# EAGLE board Steckkarte (EAGLE 9.3.1)
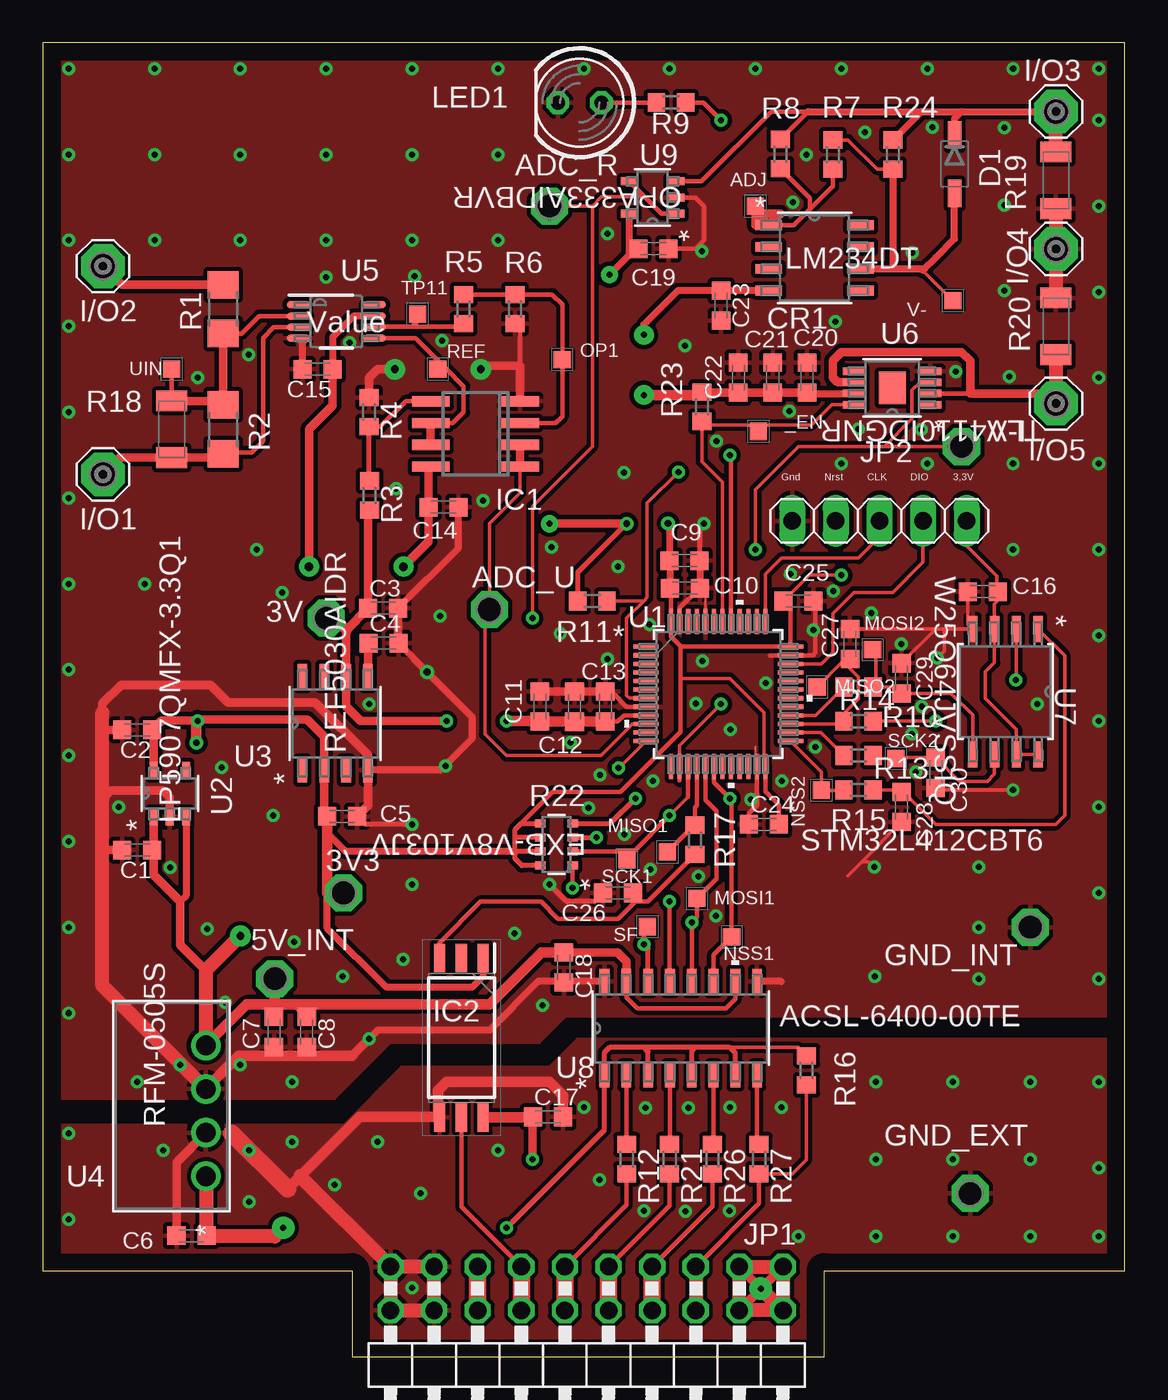
[diagram p0: board, top side]
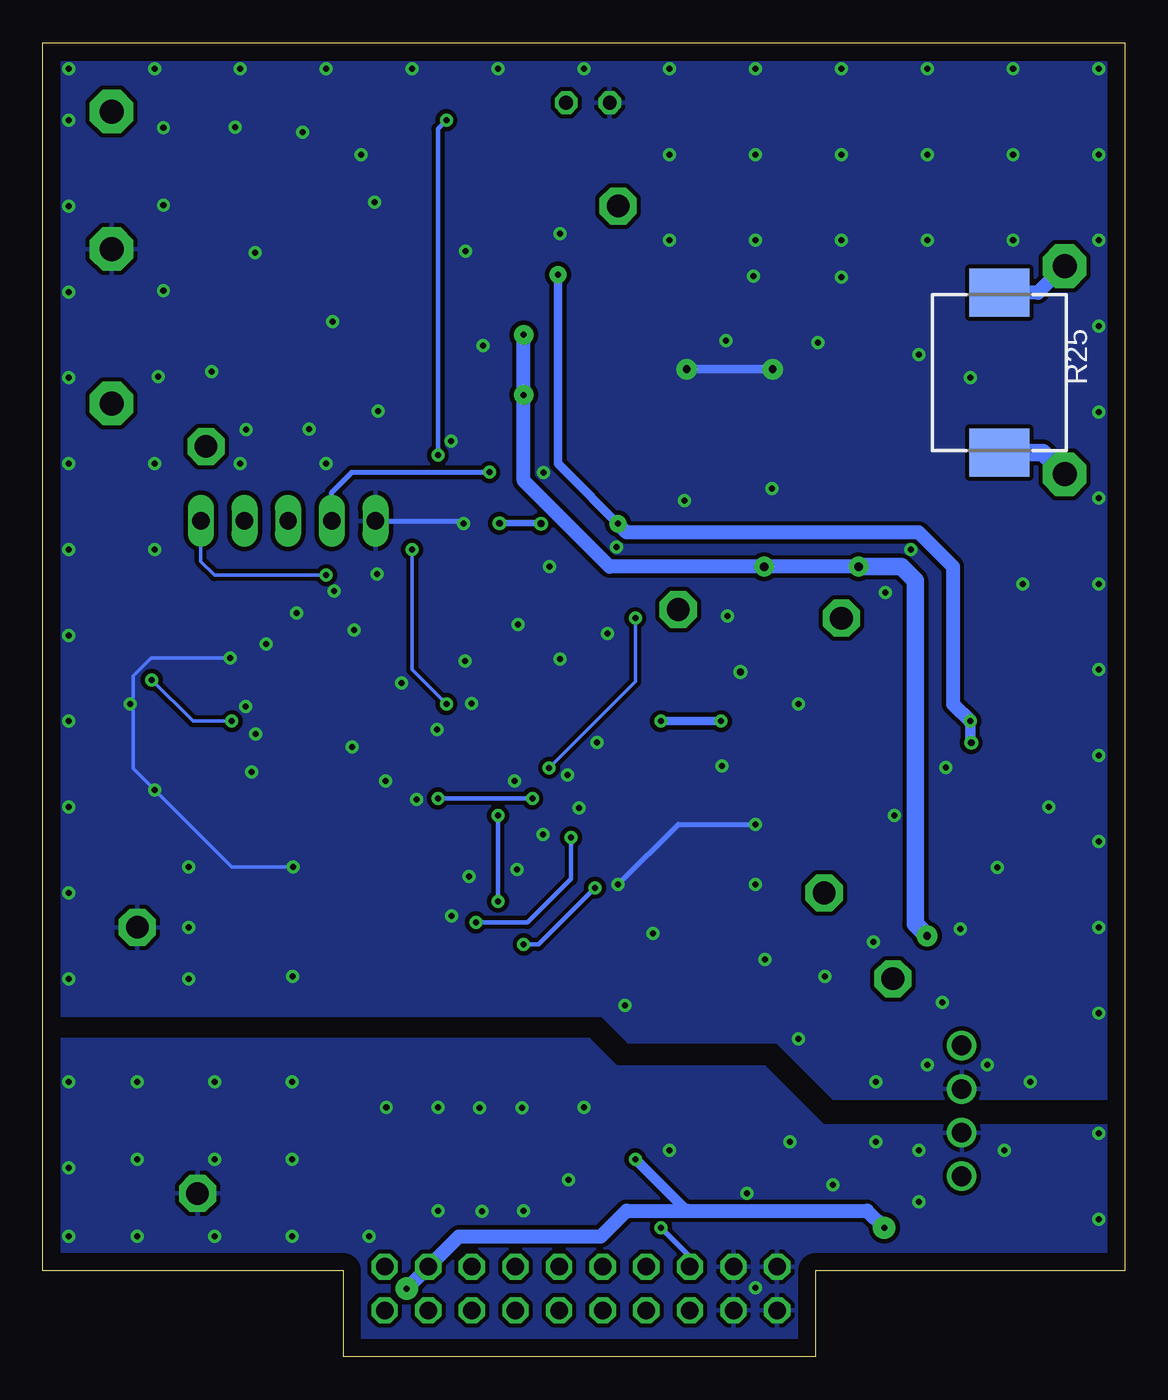
[diagram p1: board, bottom side, seen from below]

Size 63 x 76.5 mm. Coordinates in mm from the lower left corner, seen from the top.
Outline: 0,76.5 0,5 18,5 18,0 45.5,0 45.5,5 63,5 63,76.5 0,76.5
Copper layers (1*16): Top 0.035mm / dielectric 1.5mm / Bottom 0.035mm
Design rules "default": minimum track width 6mil, minimum drill 0.35mm, track to track 6mil, track to pad 6mil, pad to pad 6mil, via to via 6mil, smd to smd 6mil, copper to edge 40mil, drill to drill 6mil, minimum pad ring 10mil, minimum via ring 8mil, stop-mask expansion 4mil, vias tented up to drill 0mil, thermal gap 10mil

## Footprints (pad centres in the part's own frame; a part is rotated, then mirrored left to right if it is on the bottom)
P1-13 = drill 1.321 pad 2.159 octagon: TP 0,0
TESTPOINT_SMD-10SN = smd 1 x 1: TP 0,0
C0603K = smd 1.05 x 1.08: 1 -0.875,0; 2 0.875,0
SO-8 = smd 1.538 x 0.568: 1 -2.68,1.905; 2 -2.68,0.635; 3 -2.68,-0.635; 4 -2.68,-1.905; 5 2.68,-1.905; 6 2.68,-0.635; 7 2.68,0.635; 8 2.68,1.905
SOD123 = smd 1.6 x 0.8: 1 -1.7,0; 2 1.7,0
SE14 = drill 1.397 pad 2.54 octagon: MP 0,0
SO08 = smd 0.6 x 2.2: 1 -1.905,-2.6; 2 -0.635,-2.6; 3 0.635,-2.6; 4 1.905,-2.6; 5 1.905,2.6; 6 0.635,2.6; 7 -0.635,2.6; 8 -1.905,2.6
SOIC127P1000X220-6N = smd 1.65 x 0.65: 1 -4.65,1.27; 2 -4.65,0; 3 -4.65,-1.27; 4 4.65,-1.27; 5 4.65,0; 6 4.65,1.27
2X10/90 = drill 1.016 octagon: 1 -11.43,-6.35; 2 -11.43,-3.81; 3 -8.89,-6.35; 4 -8.89,-3.81; 5 -6.35,-6.35; 6 -6.35,-3.81; 7 -3.81,-6.35; 8 -3.81,-3.81; 9 -1.27,-6.35; 10 -1.27,-3.81; 11 1.27,-6.35; 12 1.27,-3.81; 13 3.81,-6.35; 14 3.81,-3.81; 15 6.35,-6.35; 16 6.35,-3.81; 17 8.89,-6.35; 18 8.89,-3.81; 19 11.43,-6.35; 20 11.43,-3.81
1X05 = drill 1.016 long: 1 -5.08,0; 2 -2.54,0; 3 0,0; 4 2.54,0; 5 5.08,0
LED5MM = drill 0.813 octagon: A -1.27,0; K 1.27,0
R1206 = smd 1.6 x 1.803: 1 -1.422,0; 2 1.422,0
R0603 = smd 1 x 1.1: 1 -0.85,0; 2 0.85,0
CT/CN1206 = smd 1.2 x 1.8: 1 -1.65,0; 2 1.65,0
EXBV8V = smd 0.609 x 0.47: 1 -0.946,1.219; 2 -0.946,0.406; 3 -0.946,-0.406; 4 -0.946,-1.219; 5 0.946,-1.219; 6 0.946,-0.406; 7 0.946,0.406; 8 0.946,1.219
CU4032K = smd 2.8 x 3.5: 1 -4.65,0; 2 4.65,0
LQFP-48 = smd 1.462 x 0.239: 1 -4.216,2.75; 2 -4.216,2.25; 3 -4.216,1.75; 4 -4.216,1.25; 5 -4.216,0.75; 6 -4.216,0.25; 7 -4.216,-0.25; 8 -4.216,-0.75; 9 -4.216,-1.25; 10 -4.216,-1.75; 11 -4.216,-2.25; 12 -4.216,-2.75; 25 4.216,-2.75; 26 4.216,-2.25; 27 4.216,-1.75; 28 4.216,-1.25; 29 4.216,-0.75; 30 4.216,-0.25; 31 4.216,0.25; 32 4.216,0.75; 33 4.216,1.25; 34 4.216,1.75; 35 4.216,2.25; 36 4.216,2.75 | smd 0.239 x 1.462: 13 -2.75,-4.216; 14 -2.25,-4.216; 15 -1.75,-4.216; 16 -1.25,-4.216; 17 -0.75,-4.216; 18 -0.25,-4.216; 19 0.25,-4.216; 20 0.75,-4.216; 21 1.25,-4.216; 22 1.75,-4.216; 23 2.25,-4.216; 24 2.75,-4.216; 37 2.75,4.216; 38 2.25,4.216; 39 1.75,4.216; 40 1.25,4.216; 41 0.75,4.216; 42 0.25,4.216; 43 -0.25,4.216; 44 -0.75,4.216; 45 -1.25,4.216; 46 -1.75,4.216; 47 -2.25,4.216; 48 -2.75,4.216
DBV5 = smd 0.972 x 0.468: 1 -1.362,0.95; 2 -1.362,0; 3 -1.362,-0.95; 4 1.362,-0.95; 5 1.362,0.95
D8 = smd 1.455 x 0.568: 1 -2.721,1.905; 2 -2.721,0.635; 3 -2.721,-0.635; 4 -2.721,-1.905; 5 2.721,-1.905; 6 2.721,-0.635; 7 2.721,0.635; 8 2.721,1.905
RFM-0505S = drill 1.143 pad 1.651: 1 0,0; 2 2.54,0; 3 5.08,0; 4 7.62,0
DGK0008A_N = smd 1.35 x 0.45: 1 -2.225,0.975; 2 -2.225,0.325; 3 -2.225,-0.325; 4 -2.225,-0.975; 5 2.225,-0.975; 6 2.225,-0.325; 7 2.225,0.325; 8 2.225,0.975
DGN8_1P89X1P57 = smd 1.328 x 0.441: 1 -2.213,0.975; 2 -2.213,0.325; 3 -2.213,-0.325; 4 -2.213,-0.975; 5 2.213,-0.975; 6 2.213,-0.325; 7 2.213,0.325; 8 2.213,0.975 | smd 1.57 x 1.89: EPAD 0,0
SOIC-8_5P28X5P28 = smd 1.513 x 0.543: 1 -3.645,1.905; 2 -3.645,0.635; 3 -3.645,-0.635; 4 -3.645,-1.905; 5 3.645,-1.905; 6 3.645,-0.635; 7 3.645,0.635; 8 3.645,1.905
SOIC_6400-00TE = smd 1.455 x 0.568: 1 -2.721,4.445; 2 -2.721,3.175; 3 -2.721,1.905; 4 -2.721,0.635; 5 -2.721,-0.635; 6 -2.721,-1.905; 7 -2.721,-3.175; 8 -2.721,-4.445; 9 2.721,-4.445; 10 2.721,-3.175; 11 2.721,-1.905; 12 2.721,-0.635; 13 2.721,0.635; 14 2.721,1.905; 15 2.721,3.175; 16 2.721,4.445

## Placement (x,y rotation side)
3V  TPPAD1-13  [P1-13]  16.5,43 0 top
3V3  TPPAD1-13  [P1-13]  17.5,27 0 top
5V_INT  TPPAD1-13  [P1-13]  13.5,22 0 top
_EN  TESTPOINT_TPS-SMD-10SN  [TESTPOINT_SMD-10SN]  41.68,53.88 0 top
ADC_R  TPPAD1-13  [P1-13]  29.5,67 0 top
ADC_U  TPPAD1-13  [P1-13]  26,43.5 0 top
ADJ  TESTPOINT_TPS-SMD-10SN  [TESTPOINT_SMD-10SN]  41.5,67 0 top
C1  4,7µ  [C0603K]  5.5,29.5 180 top
C2  2.2µ  [C0603K]  5.5,36.5 180 top
C3  4.7µ  [C0603K]  19.82,43.58 0 top
C4  1µ  [C0603K]  19.83,41.54 0 top
C5  2.2µ  [C0603K]  17.43,31.46 0 top
C6  6,8µ  [C0603K]  8.65,7.04 180 top
C7  4.7µ  [C0603K]  13.46,18.91 270 top
C8  NC  [C0603K]  15.36,18.91 270 top
C9  4.7µ  [C0603K]  37.37,46.35 0 top
C10  100n  [C0603K]  37.38,44.75 0 top
C11  4.7µ  [C0603K]  28.94,37.85 270 top
C12  100n  [C0603K]  30.96,37.84 270 top
C13  10n  [C0603K]  32.75,37.85 270 top
C14  100n  [C0603K]  23.33,49.46 0 top
C15  100n  [C0603K]  16,57.5 180 top
C16  100n  [C0603K]  54.75,44.54 180 top
C17  100n  [C0603K]  29.41,13.96 0 top
C18  100n  [C0603K]  30.33,22.66 270 top
C19  100n  [C0603K]  35.56,64.51 180 top
C20  100n  [C0603K]  44.5,57 90 top
C21  1µ  [C0603K]  42.5,57 90 top
C22  4.7µ  [C0603K]  40.5,57 90 top
C23  100n  [C0603K]  39.49,61.21 270 top
C24  100n  [C0603K]  42,31 0 top
C25  100n  [C0603K]  44,44 0 top
C26  [C0603K]  33.5,27 180 top
C27  100n  [C0603K]  47,41.5 90 top
C28  100n  [C0603K]  50,32 90 top
C29  100n  [C0603K]  50,39.5 90 top
C30  100n  [C0603K]  52,34 90 top
CR1  LM234DT  [SO-8]  44.94,63.98 0 top
D1  [SOD123]  53.09,69.45 270 top
GND_EXT  TPPAD1-13  [P1-13]  54,9.5 0 top
GND_INT  TPPAD1-13  [P1-13]  57.5,25 0 top
I/O1  SE14  [SE14]  3.5,51.38 0 top
I/O2  SE14  [SE14]  3.5,63.5 0 top
I/O3  SE14  [SE14]  59,72.5 0 top
I/O4  SE14  [SE14]  59,64.5 0 top
I/O5  SE14  [SE14]  59,55.5 0 top
IC1  OPA2333D  [SO08]  25.19,53.73 90 top
IC2  TLP2768A_TP,E  [SOIC127P1000X220-6N]  24.37,18.57 270 top
JP1  [2X10/90]  31.67,-1.12 180 top
JP2  [1X05]  48.72,48.67 180 top
LED1  [LED5MM]  31.26,73.02 180 top
MISO1  TESTPOINT_TPS-SMD-10SN  [TESTPOINT_SMD-10SN]  36.37,29.38 0 top
MISO2  TESTPOINT_TPS-SMD-10SN  [TESTPOINT_SMD-10SN]  45.09,39 0 top
MOSI1  TESTPOINT_TPS-SMD-10SN  [TESTPOINT_SMD-10SN]  38.08,26.68 0 top
MOSI2  TESTPOINT_TPS-SMD-10SN  [TESTPOINT_SMD-10SN]  48.32,41.17 0 top
NSS1  TESTPOINT_TPS-SMD-10SN  [TESTPOINT_SMD-10SN]  40.11,24.44 0 top
NSS2  TESTPOINT_TPS-SMD-10SN  [TESTPOINT_SMD-10SN]  45.33,32.98 0 top
OP1  TESTPOINT_TPS-SMD-10SN  [TESTPOINT_SMD-10SN]  30.25,58.06 0 top
R1  5M  [R1206]  10.5,61 90 top
R2  100k  [R1206]  10.5,54 90 top
R3  10k  [R0603]  19.03,50.15 270 top
R4  20k  [R0603]  19,55 270 top
R5  40k  [R0603]  24.5,61 270 top
R6  120k  [R0603]  27.5,61 90 top
R7  536  [R0603]  46,70 270 top
R8  536  [R0603]  42.94,70.03 270 top
R9  1k  [R0603]  36.59,73.03 0 top
R10  22  [R0603]  47.5,37 180 top
R11  1k  [R0603]  32,44 180 top
R12  160  [R0603]  34,11.5 270 top
R13  22  [R0603]  47.5,35 0 top
R14  22  [R0603]  47.5,39 0 top
R15  22  [R0603]  47.5,33 180 top
R16  10k  [R0603]  44.47,16.67 90 top
R17  160  [R0603]  37.97,30.09 90 top
R18  VARISTORCN1206  [CT/CN1206]  7.5,54 270 top
R19  VARISTORCN1206  [CT/CN1206]  59,68.5 270 top
R20  VARISTORCN1206  [CT/CN1206]  59,60 90 top
R21  160  [R0603]  36.5,11.5 270 top
R22  EXB-V8V103JV  [EXBV8V]  29.91,29.82 180 top
R23  10k  [R0603]  38.38,55.31 90 top
R24  0  [R0603]  49.5,70 270 top
R25  VARISTORCU4032K  [CU4032K]  7.3,57.3 270 bottom
R26  160  [R0603]  39,11.5 270 top
R27  160  [R0603]  41.71,11.5 270 top
REF  TESTPOINT_TPS-SMD-10SN  [TESTPOINT_SMD-10SN]  23,57.5 0 top
SCK1  TESTPOINT_TPS-SMD-10SN  [TESTPOINT_SMD-10SN]  34.02,28.93 0 top
SCK2  TESTPOINT_TPS-SMD-10SN  [TESTPOINT_SMD-10SN]  49.67,34.83 0 top
SF  TESTPOINT_TPS-SMD-10SN  [TESTPOINT_SMD-10SN]  35.2,25.04 0 top
TP11  TESTPOINT_TPS-SMD-10SN  [TESTPOINT_SMD-10SN]  21.83,60.7 0 top
U1  STM32L412CBT6  [LQFP-48]  39.33,38.59 0 top
U2  LP5907QMFX-3.3Q1  [DBV5]  7.39,32.79 90 top
U3  REF5030AIDR  [D8]  17.02,36.87 90 top
U4  RFM-0505S  [RFM-0505S]  9.49,10.5 90 top
U5  Value  [DGK0008A_N]  17.09,60.27 0 top
U6  TLV4110IDGNR  [DGN8_1P89X1P57]  49.46,56.41 180 top
U7  W25Q64JVSSIQ  [SOIC-8_5P28X5P28]  56.05,38.72 270 top
U8  ACSL-6400-00TE  [SOIC_6400-00TE]  37.15,19.12 90 top
U9  OPA333AIDBVR  [DBV5]  35.5,67.5 180 top
UIN  TESTPOINT_TPS-SMD-10SN  [TESTPOINT_SMD-10SN]  7.5,57.5 0 top
V-  TESTPOINT_TPS-SMD-10SN  [TESTPOINT_SMD-10SN]  53,61.5 180 top
V-I  TPPAD1-13  [P1-13]  53.5,53 0 top

## Library data of the parts
3V 3V3 5V_INT ADC_R ADC_U GND_EXT GND_INT V-I = testpad
_EN ADJ MISO1 MISO2 MOSI1 MOSI2 NSS1 NSS2 OP1 REF SCK1 SCK2 SF TP11 UIN V- = 52101-101-REV-A; BOM: EXCLUDE
C1-C5 C9-C30 = rcl; SPICEPREFIX: C
C6-C8 = resistor
CR1 = LM234; BUILT_BY: EMA_UL_Team; MANUFACTURER_PART_NUMBER: LM234DT; VENDOR: STMicroelectronics
D1 = semicon-smd-ipc
I/O1-I/O5 = solpad
IC1 = linear
IC2 = SamacSys_Parts; DESCRIPTION: High Speed Optocouplers High-Speed (20 Mbps) IC Photocoupler; HEIGHT: 2.2mm; MANUFACTURER_NAME: Toshiba; MANUFACTURER_PART_NUMBER: TLP2768A(TP,E; MOUSER_PART_NUMBER: 757-TLP2768ATPE; MOUSER_PRICE-STOCK: https://www.mouser.com/Search/Refine.aspx?Keyword=757-TLP2768ATPE
JP1 JP2 = pinhead
LED1 = led
R1-R17 R21 R23 R24 R26 R27 = rcl; SPICEPREFIX: R
R18-R20 R25 = varistor
R22 = EXB-V8V103; BUILT_BY: EMA_UL_Team; MANUFACTURER_PART_NUMBER: EXB-V8V103JV; VENDOR: Panasonic
U1 = stm32l412CB6T; BUILT_BY: EMA_Jessica; COPYRIGHT: Copyright (C) 2018 Accelerated Designs. All rights reserved; MANUFACTURER_PART_NUMBER: STM32L412CBT6; VENDOR: STMicroelectronics
U2 = LP5907; BUILT_BY: EMA_UL_Team; MANUFACTURER_PART_NUMBER: LP5907QMFX-3.3Q1; VENDOR: Texas Instruments
U3 = REF5030; BUILT_BY: EMA_UL_Team; MANUFACTURER_PART_NUMBER: REF5030AIDR; VENDOR: Texas Instruments
U4 = RFM0505S; BUILT_BY: EMA_Cory; COPYRIGHT: Copyright (C) 2018 Accelerated Designs. All rights reserved; MANUFACTURER_PART_NUMBER: RFM-0505S; VENDOR: Recom Power
U5 = ina317; MANUFACTURER: Texas Instruments; PARTNUMBER: INA317IDGKR; REFDES: RefDes; TYPE: TYPE
U6 = TLV4110; DATASHEET_URL: http://www.ti.com/lit/gpn/TLV4110; DESCRIPTION: High Output Drive, Low Voltage, Single Operational Amplifier w/Shutdown; FAMILY_NAME: HIGH OUTPUT CURRENT; GENERIC_PART_NUMBER: TLV4110; INDUSTRY_STD_PKG_TYPE: MSOP-PowerPAD; MANUFACTURER: Texas Instruments; MANUFACTURER_PART_NUMBER: TLV4110IDGNR; PACKAGE_DESIGNATOR: DGN; PIN_COUNT: 8; VENDOR: Texas Instruments
U7 = W25Q64JVSSIQ; BUILT_BY: EMA_Anthony; COPYRIGHT: Copyright (C) 2018 Accelerated Designs. All rights reserved; MANUFACTURER_PART_NUMBER: W25Q64JVSSIQ; VENDOR: Winbond
U8 = ACSL-6400; BUILT_BY: EMA_Matt; COPYRIGHT: Copyright (C) 2018 Accelerated Designs. All rights reserved; MANUFACTURER_PART_NUMBER: ACSL-6400-00TE; VENDOR: Broadcom
U9 = OPA2333ADBV; DATASHEET_URL: http://www.ti.com/lit/gpn/OPA333; DESCRIPTION: 1.8V, 17µA, microPower, Precision, Zero Drift CMOS Op Amp; FAMILY_NAME: LOW OFFSET VOLTAGE; GENERIC_PART_NUMBER: OPA333; INDUSTRY_STD_PKG_TYPE: SOT-23; MANUFACTURER: Texas Instruments; MANUFACTURER_PART_NUMBER: OPA333AIDBVR; PACKAGE_DESIGNATOR: DBV; PIN_COUNT: 5; VENDOR: Texas Instruments

## Nets
3.3V_EXT: JP1.15 JP1.16 R16.2 U8.1 U8.3 U8.5 U8.7
5V_EXT: C6.1 C17.1 IC2.6 JP1.1 JP1.2 JP1.3 JP1.4 U4.1
+3V3: 3V3.TP C2.1 C5.1 C9.1 C10.1 C16.1 C19.2 C24.2 C25.1 IC2.1 JP2.1 R11.2 R22.5 R22.6 R22.7 R22.8 U1.24 U1.36 U1.48 U2.5 U3.2 U7.3 U7.7 U7.8 U9.5
+5V: 5V_INT.TP C1.1 C7.1 C8.1 C14.1 C15.1 C18.1 C20.1 C21.1 C22.1 C23.1 CR1.4 IC1.8 R23.2 U2.1 U2.3 U4.4 U5.7 U6.7 U8.10 U8.15
ADC1: ADC_U.TP IC1.1 IC1.2 U1.10
ADC2: ADC_R.TP U1.12 U9.1 U9.4
DAC1: U1.14 U6.3 V-I.TP
DAC1_EN: _EN.TP R23.1 U1.42 U6.8
GND: C6.2 C17.2 GND_EXT.TP IC2.4 JP1.17 JP1.18 JP1.19 JP1.20 U4.2
GND5: C1.2 C2.2 C3.2 C4.2 C5.2 C7.2 C8.2 C9.2 C10.2 C11.1 C12.1 C13.1 C14.2 C15.2 C16.2 C18.2 C19.1 C20.2 C21.2 C22.2 C23.2 C24.1 C25.2 C26.2 C27.2 C28.1 C29.2 C30.1 GND_INT.TP I/O4.MP IC1.4 JP2.5 LED1.K R4.1 R6.1 R19.2 R20.2 U1.8 U1.23 U1.35 U1.44 U1.47 U2.2 U3.4 U4.3 U5.4 U6.4 U7.4 U8.9 U8.16 U9.2
LED: R9.2 U1.41
LSP1: I/O2.MP R1.2 R25.1
LSP2: I/O1.MP R2.1 R18.2 R25.2 U5.3
LSP3: D1.1 I/O3.MP R8.1 R19.1 R24.1 U9.3
LSP5: I/O5.MP R20.1 U6.2 U6.6
MISO_EXT: IC2.5 JP1.13 JP1.14
MOSI_EXT: JP1.7 JP1.8 R26.2
N$1: LED1.A R9.1
N$2: R1.1 R2.2 R18.1 U5.2 UIN.TP
N$3: R10.1 U7.2
N$4: R5.2 TP11.TP U5.6
N$6: IC1.5 R3.1 R4.2
N$7: C4.1 U3.5
N$8: IC1.6 IC1.7 REF.TP U5.5
N$9: R27.1 U8.8
N$11: CR1.6 D1.2 R7.1 R24.2 V-.TP
N$12: ADJ.TP CR1.1 R7.2 R8.2
N$13: C30.2 R13.2 SCK2.TP U7.6
N$14: C29.1 MOSI2.TP R14.2 U7.5
N$15: C28.2 R15.1 U7.1
N$16: R26.1 U8.6
N$17: R21.1 U8.4
N$18: R12.1 U8.2
N$19: C26.1 IC2.3 R17.1
OP1: IC1.3 OP1.TP R5.1 R6.2
RST: JP2.4 R11.1 U1.7
SCLK_EXT: JP1.9 JP1.10 R21.2
SF_EXT: JP1.11 JP1.12 R12.2
SF_INT: R22.1 SF.TP U8.14
SPI1_MISO: MISO1.TP R17.2 U1.16
SPI1_MOSI: MOSI1.TP R22.3 U1.17 U8.12
SPI1_NSS: NSS1.TP R22.4 U1.18 U8.11
SPI1_SCK: R22.2 SCK1.TP U1.15 U8.13
SPI2_MISO: C27.1 MISO2.TP R10.2 U1.27
SPI2_MOSI: R14.1 U1.28
SPI2_NSS: NSS2.TP R15.2 U1.25
SPI2_SCK: R13.1 U1.26
SS_EXT: JP1.5 JP1.6 R16.1 R27.2
SWCLK: JP2.3 U1.37
SWDIO: JP2.2 U1.34
V+: 3V.TP C3.1 C11.2 C12.2 C13.2 R3.2 U1.9 U3.6
VBAT: U1.1

## Tracks (layer width: path | path; a pad name or v marks a point on that pad's centre or on a via)
3.3V_EXT  (via drill 0.35)
  Top 0.152: R16.2 44.31,17.68
  Top 0.203: R16.2 43.99,18 40,18
  Top 0.305: v27,7.5 32.7,13.21 U8.1 32.68,16.42 32.68,17.68 33,18 35,18 | 38,18 40,18 40.33,17.68 U8.7 | 38,18 35,18 | U8.3 35.24,17.75 35,18 | U8.5 37.78,17.79 38,18
  Top 1.016: JP1.16 JP1.15
  Bottom 0.305: JP1.15 25.32,5.82 v27,7.5
5V_EXT  (via drill 0.35, 0.35 pad 1.3)
  Top 0.508: v28.5,11.5 28.5,13.99 C17.1 | JP1.3 41.83,3.96 | JP1.1 41.83,3.96 | JP1.4 41.83,3.96
  Top 0.61: C17.1 28.42,13.92 IC2.6
  Top 0.813: 9.5,7.01 9.5,7 13.5,7 v14,7.5 | 9.5,7.01 C6.1 | JP1.2 JP1.4 JP1.3 JP1.1 JP1.2 | U4.1 9.5,7.01 | JP1.2 43.1,2.9 | JP1.2 41.83,3.96 v41.81,3.96
  Bottom 0.61: v28.5,11.5 25.5,8.5
  Bottom 0.813: v41.81,3.96 38.77,7 30.5,7 29,8.5 25.5,8.5 15,8.5 v14,7.5
+3V3  (via drill 0.35, 0.35 pad 1, 0.4 pad 0.8)
  Top 0.203: U7.8 U7.7 56.69,36.52 54.89,38.32 54.89,39.89 55.41,40.41 U7.3 55.41,43.83 55.54,43.96 55.54,44.46 | 55.54,44.46 C16.1 | JP2.1 53.8,47.2 55.54,45.46 55.54,44.46 | C25.1 44.62,45.5 v46.5,45.5 | 37.13,39.5 40,39.5 42,37.5 42,35 42.08,34.92 U1.24
  Top 0.254: C10.1 36.58,44.75 U1.48 36.58,41.93 37.17,41.34 | 27.8,30.99 29.69,32.88 33.63,32.88 37.13,36.38 37.13,39.5 37.13,41.34 37.17,41.34 | C25.1 43.55,43.58 U1.36 37.17,41.34 | U1.24 42.08,32.92 42.75,32.25 42.88,32.12 C24.2
  Top 0.305: R22.8 27.9,28.6 27.5,29 27.5,29.46 | 27.5,29.46 27.5,30.23 | 27.5,30.23 27.5,30.69 27.8,30.99 27.85,31.04 R22.5 | R22.6 27.5,30.23 | 27.5,30.23 | R22.7 27.55,29.41 27.5,29.46 | 31,44.15 R11.2 31.15,45.68 33.99,48.51
  Top 0.406: C10.1 36.51,46.34 C9.1 36.49,48.44 v36.41,48.52 | 27.55,29.41 17.64,29.41 16.55,30.5 | IC2.1 25.64,22.14 25,21.5 20,21.5 16.55,24.95 16.55,27 | U9.5 34.14,64.5 | 34.14,64.5 34.14,64.14 v33,63 | C19.2 34.15,64.51 34.14,64.5
  Top 0.508: C5.1 16.38,31.63 U3.2 16.38,36.12 15.39,37.11 9,37.11 | 8.94,37.04 6.92,37.04 C2.1 6.44,36.44 U2.5 | v29.5,48.5 29.51,48.51 33.99,48.51
  Top 0.61: C5.1 16.55,30.5 16.55,27 3V3.TP | v8.94,35.75 8.94,37.04 9,37.11 | 33.99,48.51 v34,48.5
  Bottom 0.203: v46.5,45.5 53,45.5 53.8,46.3 JP2.1
  Bottom 0.406: v34,48.5 v36.41,48.52
  Bottom 0.508: 29,48 33,52 v33,63
  Bottom 0.61: v8.94,35.75 9,35.81 v9,37
  Bottom 0.813: v9,37 10,38 10,46 12,48 29,48 v29.5,48.5
+5V  (via drill 0.35 pad 1.15, 0.45 pad 1.2, 0.5 pad 1.15)
  Top 0.203: 38.41,56.12 R23.2
  Top 0.254: 34,20.93 34.64,20.29 39.79,20.29 40.33,20.82 U8.10
  Top 0.305: 34,21.82 34,20.93
  Top 0.406: C7.1 13.5,19.82 13.5,20.5 14.65,20.5 C8.1 15.36,20.36 15.5,20.5 | U2.3 8.34,26.84 8,26.5 | 30.29,23.5 C18.1 | U8.15 34,21.82 | CR1.4 39.5,62.08 C23.1 36.99,62.09 35,60.09 v35,59.5 | U5.7 18.09,60.59 16.88,59.38 C15.1 | C20.1 44.54,56.09 U6.7
  Top 0.508: IC1.8 22.45,51.69 C14.1 22.45,47.45 v21,46 | U2.1 6.44,29.57 | 6.44,29.57 6.44,28.06 8,26.5 8,23.98 9.49,22.49 | C18.1 33.46,23.54 33.98,23.02 U8.15 | C1.1 6.44,29.57 | v15.5,46 15.5,54 16.88,55.38 C15.1 16.64,57.27 | C20.1 C21.1 C22.1 38.41,56.12 | 39.08,62.08 39.5,62.08
  Top 0.61: U4.4 11.87,20.5 13.5,20.5 | 13.5,20.5 15.5,20.5 26.01,20.5 29.05,23.54 30.25,23.54 30.29,23.5 | 5V_INT.TP 13.5,20.5 | R23.2 38.22,56 v35,56
  Top 0.813: v11.5,24.5 9.49,22.49 U4.4
  Bottom 0.813: v15.5,46 v21,46 30,46 35,51 v35,56 v35,59.5
  Bottom 1.016: v11.5,24.5 12.2,25.2 12.2,45.2 13,46 v15.5,46
ADC1
  Top 0.203: IC1.1 27.79,50.29 26,48.5 ADC_U.TP | 26.5,43.5 25.75,42.75 25.75,36.25 27,35 32.5,35 34.34,36.84 U1.10
  Top 0.254: ADC_U.TP 26.5,43.5
  Top 0.508: IC1.1 IC1.2
ADC2  (via drill 0.35, 0.35 pad 0.55)
  Top 0.203: U1.12 33.56,34.29 | v28.5,43 28.5,49.5 32,53 32,67 | 35.04,67.54 32.54,67.54 32,67 | ADC_R.TP 32,67
  Top 0.254: 33.56,34.29 v33.51,34.29 | U9.4 35.04,67.54 36.04,66.55 U9.1
  Bottom 0.203: v28.5,43 28.5,39.3 v33.51,34.29
DAC1  (via drill 0.35)
  Top 0.203: U1.14 37.08,35.58 v39.5,38 | v41.5,47 41.5,50.5 44,53 49,53 | 49,53 50.62,54.62 50.62,56.27 51.07,56.73 U6.3 | V-I.TP 49,53
  Top 0.254: 37.08,33.54 U1.14
  Bottom 0.203: v39.5,38 41.5,40 v41.5,47
DAC1_EN
  Top 0.203: U6.8 45.94,55.44 44.75,54.25 41.74,54.25 41.68,54.19 _EN.TP | 41.5,54.23 41.68,54.23 _EN.TP | 41.5,54.23 38.61,54.23 R23.1 38.38,52.12 39.58,50.92 U1.42 | _EN.TP 41.5,54.06 41.5,54.23
GND  (via drill 0.35 pad 0.2)
  Top 0.508: C6.2 7.78,11.32 U4.2
  Top 0.61: 14.24,9.76 14.99,10.51 18.43,13.96 23.06,13.96 | 23.06,13.96 IC2.4 | 23.06,13.96 23,14.02 23,15.5 23.5,16 29.5,16 30.28,15.22 C17.2
  Top 0.813: JP1.19 JP1.17 JP1.18 JP1.20 JP1.19 | JP1.19 20.24,5.26 14.99,10.51
  Top 1.016: 11,13 14.24,9.76
  other vias: 17,10 12,9 1.5,13 1.5,8 31.5,14.5 57.5,7 53,7 57.5,11.5 57.5,16 61.5,16 53,11.5 61.5,7 40,14.5 48.5,7 22,9.5 14.5,12.5 48.5,11.5 48.5,16 19.5,12.5 21.5,4 53,16 32.4,10.3 44,7 26.5,12 35.08,14.49 37.58,14.49 43,14.5 35,8.5 37.43,8.47 39.99,8.49 61.5,11 7,12 12,12
  pour Top (isolate 0.24): 62.5,18.5 31.1,18.5 29.48,16.87 20.87,16.87 17.5,13.5 0.5,13.5 0.5,5.19 18.5,5.19 18.5,0.5 45,0.5 45,5.5 62.5,5.5
  pour Bottom (isolate 0.254): 0.5,5.21 18.5,5.2 18.5,0.5 45,0.5 45,5.5 62.5,5.5 62.5,18.5 31.17,18.5 29.57,16.89 20.94,16.89 17.51,13.46 0.49,13.46
GND5  (via drill 0.35, 0.35 pad 0.2, 0.35 pad 0.6, 0.4 pad 0.8, 0.45 pad 1.2)
  Top 0.152: C10.2 38.58,44.42 U1.44 | U1.23 41.5,34.45 41.5,35.5
  Top 0.203: 52.5,42.37 U7.4 53.88,42.63 C16.2 | 52.5,42.37 51.99,42.37 | 51.99,42.37 C29.2 | C27.2 51.98,42.38 51.99,42.37 | C30.1 52.12,33 v56.5,33 | 46.88,28 47.69,28.81 | 47.69,28.81 C28.1 | 47.69,28.81 48.11,28.81 v48.42,28.5 | 52.5,42.37 52.5,41.1 v52.08,40.69
  Top 0.254: 42.88,21.97 43,21.84 | 42.35,40.84 U1.35 44.84,40.84 45,41 45,43.88 C25.2 | U1.8 34,37.84 33.12,38.72 C13.1 32.78,38.72 | R6.1 27.79,59.86 27.79,57.72 | U1.23 41.58,32.08 41.12,31.62 C24.1 | C19.1 38.01,64.51 38.5,65 38.5,67 38,67.5 U9.2 | U1.47 37.08,43.58 C10.2
  Top 0.305: C26.2 32.12,26.5 30.5,26.5 v29.5,27.5 | v21.5,31 18.77,31 C5.2 | v38.5,48.5 38.24,48.24 C9.2
  Top 0.406: U8.16 30.39,21.84 28.84,21.84 26,19 19.5,19 v19,18.5 | C8.2 15.5,17.9 15.5,17.5 14,17.5 C7.2 | C3.2 24.2,47.09 C14.2 | 43,21.84 U8.9 | C4.2 v22.37,39.87 25,37.24 25,36 23.15,34.15 U3.4 | C9.2 38.26,46.34 C10.2 | C15.2 15.12,59.03 U5.4
  Top 0.508: C13.1 C12.1 C11.1 | IC1.4 27.79,57.72 25.72,57.72 v25.5,57.5 | U2.2 7.39,32.56 6.99,32.96 3.96,32.96 3.46,32.46 | C4.2 20.69,41.55 C3.2 | C5.2 18.93,32.08 U3.4 18.93,35.03 15.86,38.1 10.78,38.1 9.76,39.12 4.56,39.12 3.46,38.02 3.46,37.5 3.46,36.82 | 18,17.5 v19,18.5 | R4.1 19,57 19.5,57.5 v20.5,57.5 | C1.2 3.46,29.5 | C2.2 3.46,36.5
  Top 0.61: 30.39,21.84 C18.2 | 18,17.5 15.5,17.5 11.41,17.5 U4.3 | C16.2 53.84,44.5
  Top 0.813: R19.2 I/O4.MP R20.2 | U4.3 3.46,21.61 3.46,29.5 3.46,32.46 3.46,36.5 3.46,37.5
  Bottom 0.203: v48.42,28.5 52,28.5 v56.5,33 57.75,34.25 57.75,39.63 56.69,40.69 v52.08,40.69
  Bottom 0.305: v29.5,27.5 26,31 v21.5,31 | v38.5,48.5 38.67,48.67 JP2.5
  Bottom 0.508: v20.5,57.5 v25.5,57.5
  other vias: 21.5,27.5 54.5,25 54.5,28.5 45,35.5 54.5,22 61.5,22 61.5,27 61.5,32 61.5,37 61.5,42 61.5,47 61.5,52 61.5,57 61.5,62 61.5,67 61.5,72 61.5,75 56.5,75 51.5,75 46.5,75 41.5,75 36.5,75 31.5,75 26.5,75 21.5,75 16.5,75 11.5,75 6.5,75 1.5,75 1.5,70 1.5,65 1.5,60 1.5,55 1.5,50 1.5,45 1.5,40 1.5,35 1.5,30 1.5,25 1.5,20 5.5,16 50,41.5 43.04,33.53 30.13,42.12 23.13,43.12 10.4,34.3 5.92,45 4.42,32 13.42,31.5 27.46,24.64 48.46,22.14 25.64,49.86 16.49,62.85 35.38,28.36 38.17,27.96 39.19,25.67 29.09,20.46 23.44,34.38 20.56,50.55 21.63,62.91 9.56,24.91 57.92,38 14.62,24.14 50.61,36.25 14.5,16 32.88,40.63 56.5,52 51.5,52 46.5,52 31.77,31.96 53.16,57.35 38.42,40.5 42.11,39.21 44.87,42.32 48.24,43.29 46.04,44.58 6.5,70 11.5,70 16.5,70 21.5,70 26.5,70 6.5,65 11.5,65 16.5,65 21.5,65 26.5,65 56.5,47 23.23,59.16 17.87,59.05 19,38 33.85,51.49 43.67,67.22 47.86,71.3 44.47,69.99 50.64,64.28 51.79,71.58 55.98,71.56 56.28,57.06 29.61,47.14 30.74,35.77 10.62,20.64 12.44,46.99 11.99,58.35 46.14,60.28 40.04,36.53 38.04,38.03 35.34,42.62 47.5,54 39.22,53.32 32.44,33.88 20.96,23.14 17.46,22.14 7.42,28.49 9,57 51.16,53.99 8,17 11.5,17 13.94,44.49 51.19,37.85 50.85,34.05 35.54,33.53 33.87,30.42 32.88,65.38 43.54,45.58 38.38,64.38 37.38,58.88 33.5,46 41.25,32.44 43.47,55.05 55.98,67.06 55.98,62.06
  pour Top (isolate 0.254): 0.5,15 17,15 20.25,18.25 28.91,18.25 30.47,19.81 62.5,19.81 62.5,76 0.5,76
  pour Bottom (isolate 0.254): 0.5,15 17,15 20.29,18.29 28.93,18.29 30.48,19.83 62.5,19.83 62.5,76 0.5,76
LED  (via drill 0.35 pad 0.55)
  Top 0.254: v40,52.5 40.08,52.42 U1.41 | v39.5,72 38.47,73.03 R9.2
  Bottom 0.254: v39.5,72 40,71.5 v40,52.5
LSP1
  Top 0.508: R1.2 4.58,62.42 I/O2.MP
  Bottom 0.813: I/O2.MP 5.05,61.95 R25.1
LSP2
  Top 0.254: U5.3 13.45,59.95 12.81,59.31 12.81,53.31 12.15,52.65 10.57,52.65
  Top 0.305: 10.57,52.65 R2.1
  Top 0.508: I/O1.MP 4.47,52.35 R18.2 10.27,52.35 R2.1
  Bottom 1.016: I/O1.MP 4.77,52.65 R25.2
LSP3
  Top 0.254: R8.1 44.56,72.5 42.41,72.5 38.36,68.45 U9.3
  Top 0.406: 53.5,72.5 53.09,72.09 D1.1 | R24.1 51.15,72.5 | 51.15,72.5 53.5,72.5 | 44.56,72.5 51.15,72.5 | 53.5,72.5 I/O3.MP
  Top 0.813: R19.1 I/O3.MP
LSP5
  Top 0.254: U6.2 54,56.09 | 58.41,56.09 I/O5.MP
  Top 0.305: 58.91,55.59 I/O5.MP
  Top 0.508: 58.41,56.09 54,56.09 54,58 53.5,58.5 46.5,58.5 46,58 46,57 46.27,56.73 U6.6
  Top 0.813: R20.1 I/O5.MP
MISO_EXT
  Top 0.254: JP1.13 24.37,8.72 IC2.5
  Top 1.016: JP1.14 JP1.13
MOSI_EXT
  Top 0.254: JP1.7 39,8.75 R26.2
  Top 1.016: JP1.7 JP1.8
N$1
  Top 0.254: R9.1 LED1.A
N$2
  Top 0.254: UIN.TP R18.1 | U5.2 12.6,60.59 11.58,59.58 R1.1
  Top 0.508: R1.1 10.5,55.5 | 10.5,55.5 R2.2 | R18.1 10.35,55.65 10.5,55.5
N$3  (via drill 0.35)
  Top 0.203: U7.2 56.69,39.41 v56.67,39.41 | v52,37 R10.1
  Bottom 0.203: v56.67,39.41 54.26,37 v52,37
N$4
  Top 0.254: 19.35,59.98 21.5,59.98 | TP11.TP 21.83,60.31 21.5,59.98 | 21.5,59.98 24.33,59.98 R5.2
  Top 0.406: U5.6 19.35,59.98
N$6
  Top 0.254: IC1.5 21.14,55.63 19.65,54.15 R4.2
  Top 0.305: R3.1 19,51.03 R4.2
N$7
  Top 0.508: U3.5 18.93,41.51 C4.1
N$8
  Top 0.254: IC1.6 23.86,54.37 24.5,55 24.5,56.5 23.5,57.5 | 23.5,57.5 21.7,59.3 U5.5 | REF.TP 23.5,57.5
  Top 0.508: IC1.6 IC1.7
N$9
  Top 0.203: 41.3,12.76 R27.1 41.59,12.46
  Top 0.254: U8.8 41.59,12.46
N$11
  Top 0.203: V-.TP 51.25,63.25 | R7.1 46.89,70.85 48.59,69.15 R24.2
  Top 0.254: R7.1 46,70.5
  Top 0.406: CR1.6 49.5,63.34 | 49.5,63.34 51.34,63.34 | D1.2 53.09,65.09 52,64 51.34,63.34 | 51.25,63.25 51.34,63.34 | R24.2 49.5,63.34
N$12
  Top 0.254: CR1.1 43.73,65.89 44.67,66.83 | R7.2 46,68.15 44.67,66.83 | R8.2 44.67,67.45 44.67,66.83
  Top 0.508: 42,65.89 41.5,65.89 ADJ.TP | 42,65.89 CR1.1 42.94,66.56 41.94,66.56 ADJ.TP | ADJ.TP 42,66.5 42,65.89
N$13
  Top 0.203: R13.2 48.52,34.83 SCK2.TP 49.72,34.88 C30.2 53.38,33.5 55,33.5 55.41,33.91 U7.6
N$14
  Top 0.203: R14.2 48.5,39 | 48.5,39 49.62,39 C29.1 52.88,38.62 54.15,37.35 U7.5 | MOSI2.TP 48.5,40.98 48.5,39
N$15
  Top 0.203: R15.1 49.88,33 C28.2 50.12,32.88 52,31 59,31 59.5,31.5 59.5,40.82 U7.1
N$16
  Top 0.203: 39.05,12.4 R26.1
  Top 0.254: U8.6 39.05,12.4
N$17
  Top 0.203: 36.52,12.37 R21.1
  Top 0.254: U8.4 36.52,12.37
N$18
  Top 0.203: 34,16.37 U8.2
  Top 0.254: R12.1 34,16.37
  Top 0.305: U8.2 34.08,16.29
N$19
  Top 0.254: R17.1 35.23,26.5 34.5,26.5 33.5,25.5 30,25.5 29,26.5 25.5,26.5 23.1,24.1 IC2.3
  Top 0.305: C26.1 34.5,26.88 34.5,26.5
OP1
  Top 0.254: R5.1 R6.2 29.65,61.85 30.25,61.25 OP1.TP 30.25,54.75 29.86,54.37 IC1.3
RST  (via drill 0.35)
  Top 0.203: v37,51.5 35.19,49.69 35.19,44.19 35,44 | 35,44 34,43 34,38.5 34.16,38.34 U1.7 | R11.1 35,44
  Bottom 0.305: JP2.4 46.18,50.32 45,51.5 v37,51.5
SCLK_EXT
  Top 0.254: JP1.9 36.5,8.79 R21.2
  Top 1.016: JP1.10 JP1.9
SF_EXT
  Top 0.254: R12.2 34,8.83 JP1.11
  Top 1.016: JP1.11 JP1.12
SF_INT  (via drill 0.35)
  Top 0.254: R22.1 30.86,27.32 | 35,24.84 SF.TP
  Top 0.305: 30.86,27.32 v30.84,27.3 | 35,24.84 v35,24 35.24,23.75 U8.14
  Bottom 0.254: v30.84,27.3 34.15,24 v35,24
SPI1_MISO
  Top 0.203: 37.93,30.94 R17.2
  Top 0.254: R17.2 37.97,31.97 38.08,32.08 U1.16 | MISO1.TP 37.93,30.94
SPI1_MOSI  (via drill 0.35 pad 0.25)
  Top 0.203: 38.1,26.68 MOSI1.TP
  Top 0.254: U8.12 v37.78,25.29 38.1,25.6 38.1,26.68 39.23,27.81 39.23,31.77 38.58,32.42 U1.17
  Top 0.305: R22.3 v32.24,30.23 | v32.24,30.23
  Bottom 0.254: v32.24,30.23 32.24,27.81 34.78,25.27 37.77,25.27
  Bottom 0.305: 37.77,25.27 v37.78,25.29
SPI1_NSS  (via drill 0.35 pad 0.25)
  Top 0.254: U8.11 39.05,23.39 NSS1.TP 40.11,32.39 v40,32.5 39.08,33.42 U1.18
  Top 0.305: R22.4 33.04,31.04 v34.5,32.5
  Bottom 0.254: v34.5,32.5 v40,32.5
SPI1_SCK  (via drill 0.35)
  Top 0.203: 37.58,32.58 v36.5,31.5
  Top 0.254: v36.5,31.5 34.41,29.41 34,29.41 | 34,29.41 R22.2 | SCK1.TP 34,28.95 34,29.41 | v36.5,26.5 36.5,21.86 U8.13 | U1.15 37.58,32.58
  Bottom 0.254: v36.5,26.5 v36.5,31.5
SPI2_MISO
  Top 0.203: U1.27 46.49,36.84 R10.2 46.65,37.46 47.49,38.3 47.49,39.56 47,40.06 47,40.5 | C27.1 47,40.5 | MISO2.TP 46.59,40.5 47,40.5
SPI2_MOSI
  Top 0.203: U1.28 44.99,37.34 R14.1
SPI2_NSS
  Top 0.203: U1.25 45.33,34.05 NSS2.TP 46.63,32.98 R15.2
SPI2_SCK
  Top 0.203: U1.26 45.31,36.34 R13.1
SS_EXT
  Top 0.203: R27.2 43.65,10.65 44.47,11.47 R16.1
  Top 0.254: JP1.5 41.71,8.92 R27.2
  Top 0.305: 37.97,5.28 JP1.5
  Top 0.813: JP1.5 JP1.6
SWCLK
  Top 0.203: JP2.3 48.72,47.72 47.5,46.5 43,46.5 42.08,45.58 U1.37
SWDIO
  Top 0.203: U1.34 45.34,40.34 46,41 46,43.28 47.22,44.5 49.5,44.5 51.26,46.26 JP2.2
V+  (via drill 0.35)
  Top 0.254: C13.2 33.47,36.97 33.84,37.34 U1.9
  Top 0.406: C12.2
  Top 0.508: v23.5,37 18.5,37 17.66,37.84 U3.6 17.66,42.29 17.68,42.32 C3.1 18.94,49.22
  Top 0.61: v27,37 28.91,37 C11.2 C12.2 | C12.2 C13.2 | 3V.TP 17,43 17.68,42.32 | R3.2 18.94,49.22
  Bottom 0.508: v23.5,37 v27,37

## Text on the board
tPlace: Gnd | Nrst | CLK | DIO | 3,3V
PART: Steckkarte MB2000 v.1.0